# Altium PCB PCB1.PcbDoc
Units mm, origin at the board's own origin, x right, y up, seen from the top; angles counter-clockwise.
Board outline 134.1 x 120.7 mm, 2 copper layers (Top Layer, Bottom Layer); 24 components, 52 nets, 144 pads, 10 vias.
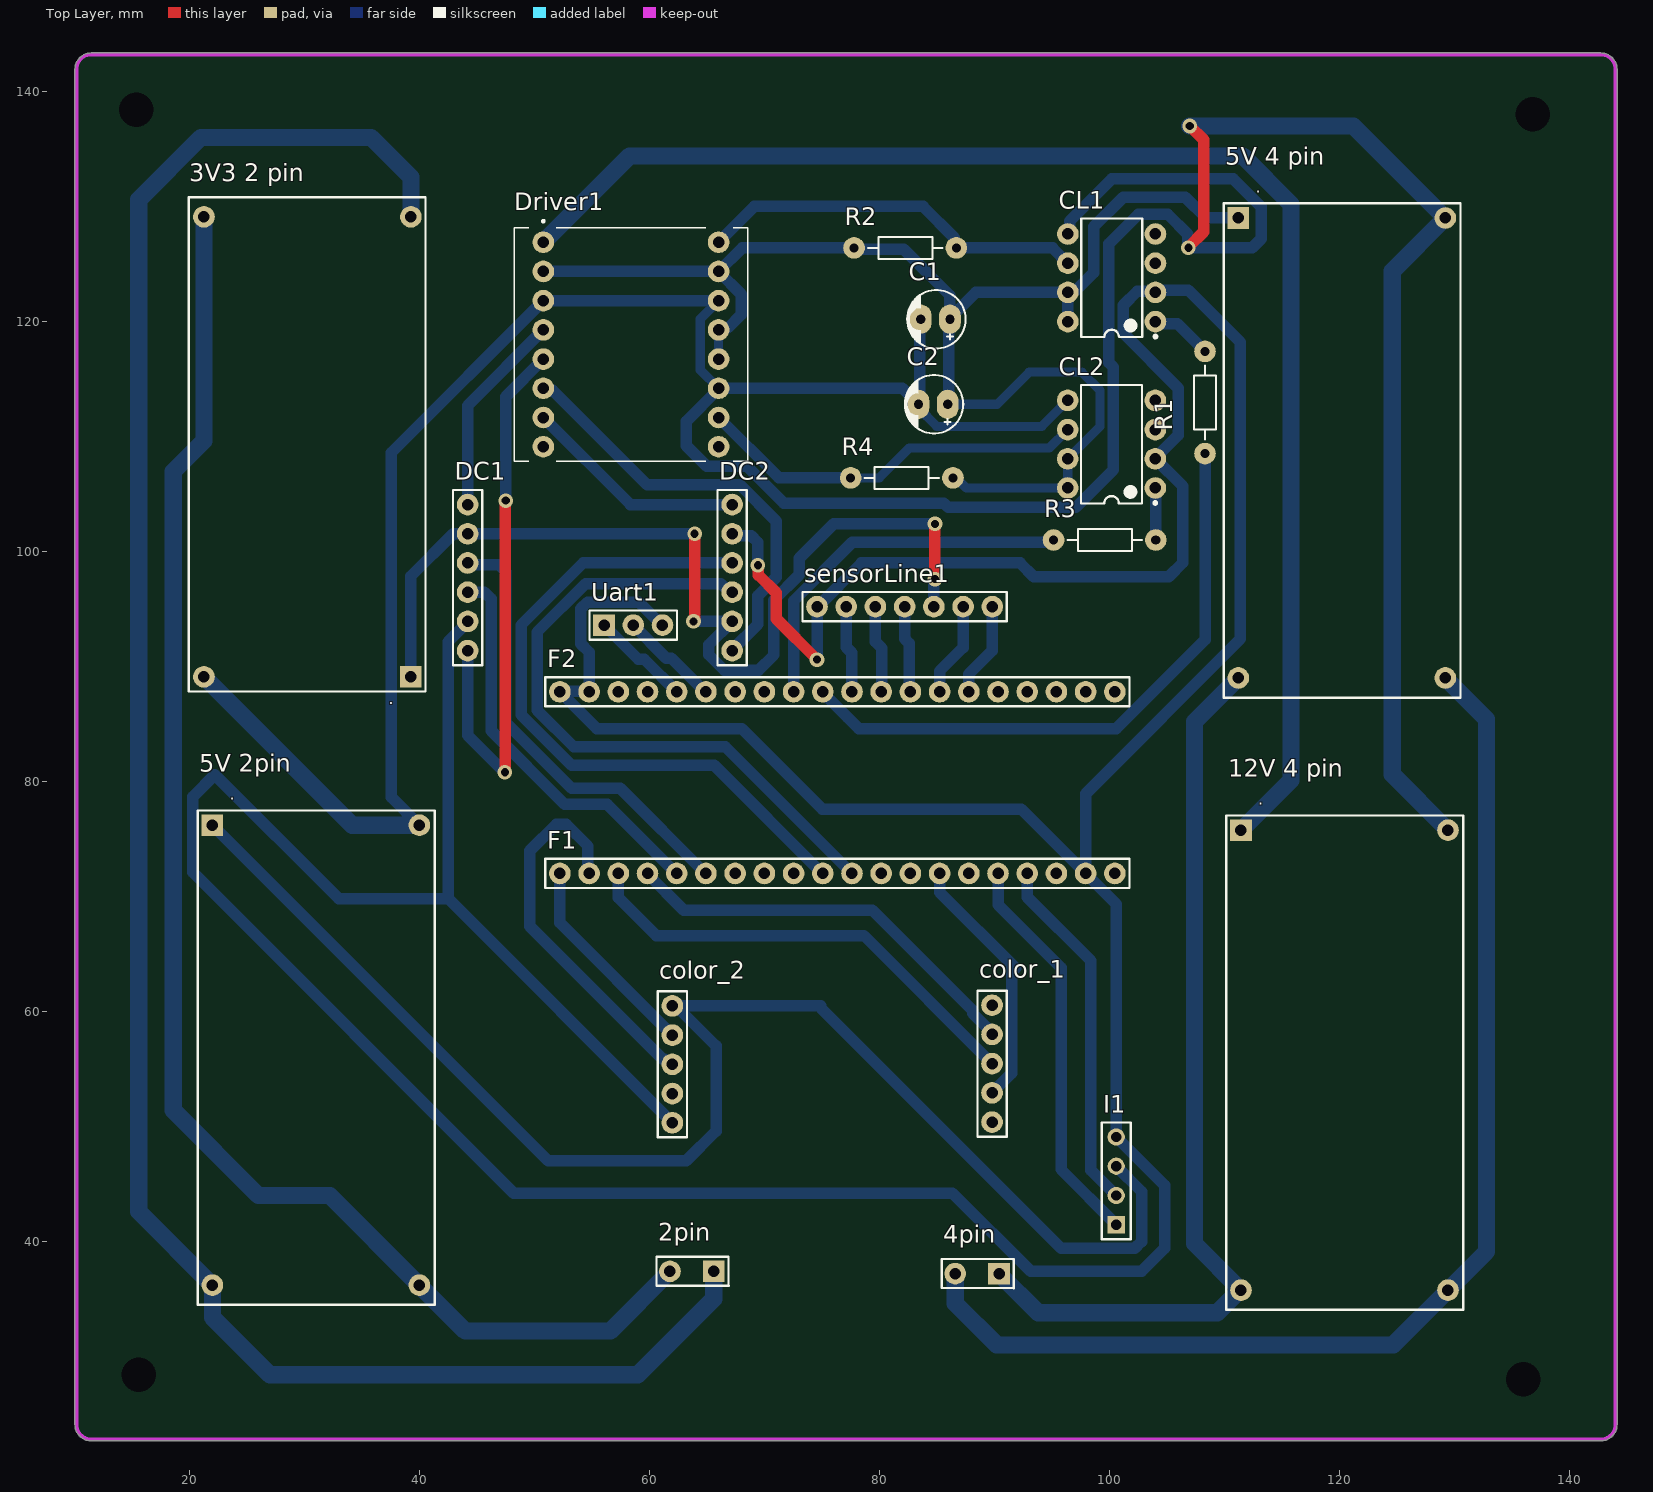
[diagram p0: Top Layer view]
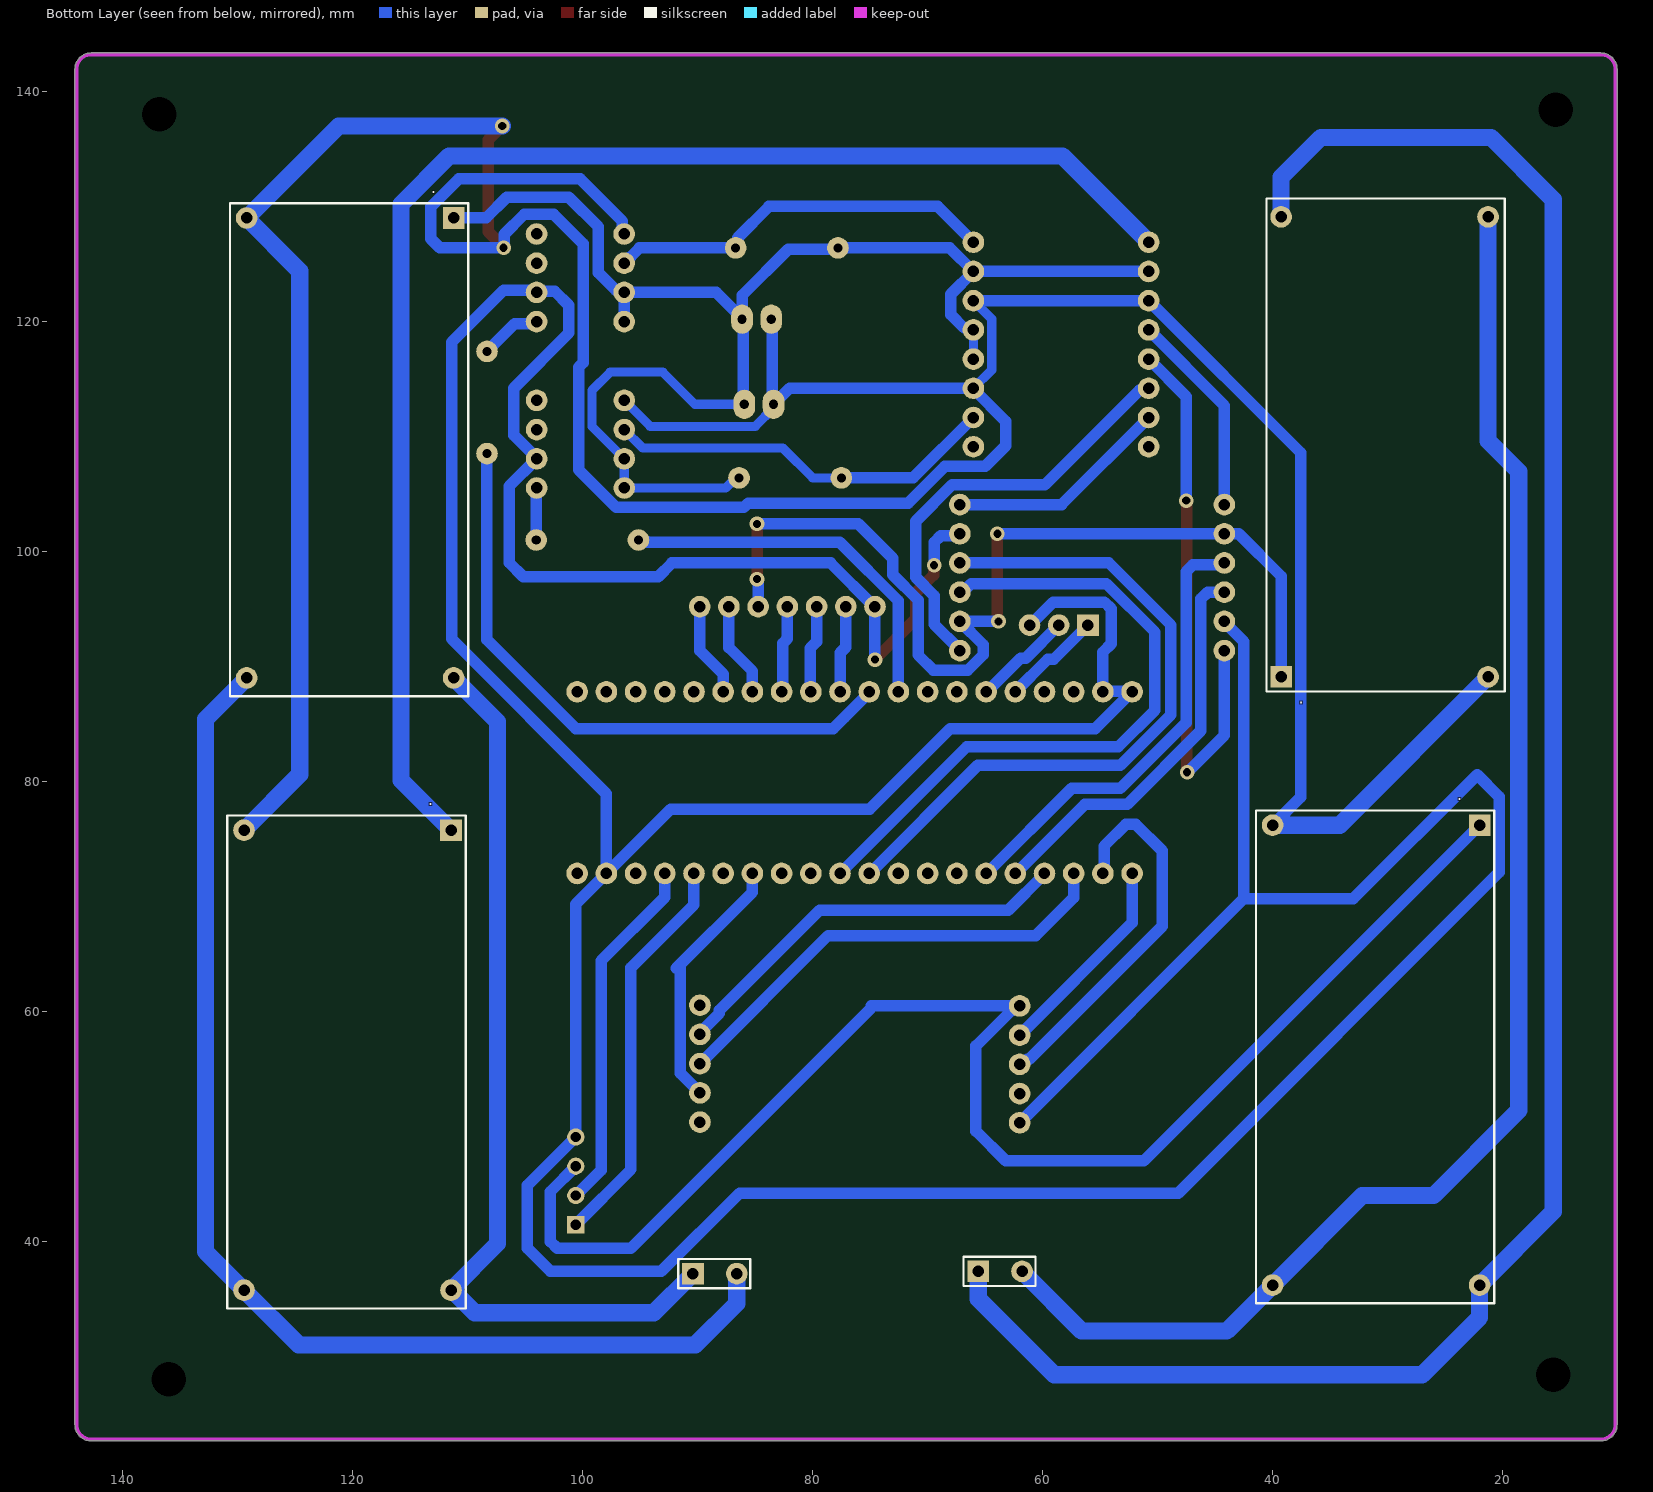
[diagram p1: Bottom Layer view, seen from below]

## Layer stack, top to bottom
Top Solder: solder mask 0.0102, Solder Resist, Dk 3.5
Top Layer: signal copper 0.0356
Dielectric 1: dielectric 0.32, FR-4, Dk 4.8
Bottom Layer: signal copper 0.0356
Bottom Solder: solder mask 0.0102, Solder Resist, Dk 3.5

## Board outline
10.011,24.07 10.011,141.93 cw(c11.432,141.93) 11.432,143.35 142.692,143.35 cw(c142.692,141.93) 144.112,141.93 144.112,24.07 cw(c142.692,24.07) 142.692,22.65 11.432,22.65 cw(c11.432,24.07)

## Design rules (kind name [scope] priority, off if disabled: settings)
Clearance [All] p1: gap=0.254 ignorepadtopadclearanceinfootprint=FALSE except(0: Arc-Hole Track-Hole SMDPad-Hole THPad-Hole Via-Hole Fill-Hole Poly-Hole Region-Hole Text-Hole)
PolygonConnect [All] p1: connectstyle=Direct reliefconductorwidth=0.254 reliefentries=4 polygonreliefangle="90 Angle" airgapwidth=0.254
RoutingVias [All] p1: holewidth=0.711 width=1.27 viastyle="Through Hole" minholewidth=0.711 minwidth=1.27 maxholewidth=0.711 maxwidth=1.27
SolderMaskExpansion [All] p1: expansion=0.102 istentingtop=FALSE
Width [All] p1: maxlimit=1.5 minlimit=0.8 preferedwidth=1
30 further rules are at their usual default settings.

## Classes and differential pairs
component class schematic_total: 2pin "3V3 2 pin" 4pin "5V 2pin" "12V 4 pin" C1 C2 CL1 CL2 color_1 color_2 DC1 DC2 F1 F2 I1 R1 R2 R3 R4 sensorLine1 Uart1

## Components (designator, comment, footprint, x,y, rotation, side; value= is the part's Value field where it differs from the comment)
2pin "IO" CON.HDR1X2 65.562,37.4 r180 top
"3V3 2 pin" "IO" CON.HDR1X4 39.227,89.099 r90 top
4pin "IO" CON.HDR1X2 90.372,37.2 r180 top
"5V 2pin" "IO" CON.HDR1X4 21.962,76.2 r270 top
"5V 4 pin" "IO" CON.HDR1X4 111.18,129 r270 top
"12V 4 pin" "IO" CON.HDR1X4 111.412,75.764 r270 top
C1 "0.1uF" CP1/2 86.102,120.2 r180 top value=10uF/50V
C2 "0.1uF" CP1/2 85.902,112.8 r180 top value=10uF/50V
CL1 "6N137" DIP-8 100.162,123.8 r180 top
CL2 "6N137" DIP-8 100.152,109.33 r180 top
color_1 "color_1" HDR1X5 89.762,50.38 r90 top
color_2 "color_2" HDR1X5 61.962,60.48 r270 top
DC1 "DC1" HDR1X6 44.162,91.38 r90 top
DC2 "DC2" HDR1X6 67.162,104.08 r270 top
Driver1 "ROB-14450" MODULE_ROB-14450 58.362,118 r0 top
F1 "F1_1" HDR1X20 52.182,72 r0 top
F2 "F1_2" HDR1X20 100.442,87.8 r180 top
I1 "I2C_LCD" HDR1X4 100.562,41.46 r90 top
R1 "220R" R1/4W 108.284,108.51 r90 top value="R1/4W - 1K"
R2 "220R" R1/4W 77.762,126.4 r0 top value="R1/4W - 1K"
R3 "220R" R1/4W 95.11,101 r0 top value="R1/4W - 1K"
R4 "220R" R1/4W 86.362,106.4 r180 top value="R1/4W - 1K"
sensorLine1 "sensorLine" HDR1X7 89.782,95.2 r180 top
Uart1 "Uart" HDR1X3 56.022,93.6 r0 top

## Footprints (in the part's own frame and the unit in brackets; to place one, negate y for a bottom-side part, rotate by r counter-clockwise, add the part's x,y. Pads: shape width x height; smd on the part's side, far side on the other; paste and mask are expansions set on the pad)
CON.HDR1X2 [mm]
  rect 1.88x1.88 hole 1: 1(0,0)
  round 1.88 hole 1: 2(3.81,0)
  silkscreen extent -1.31,-1.26 4.98,1.28
CON.HDR1X4 [mm]
  rect 1.88x1.88 hole 1: 1(0,0)
  round 1.88 hole 1: 2(0,18) 3(40,0) 4(40,18)
  silkscreen extent -1.27,-1.27 41.71,19.33, body extent -1.43,-1.32 41.64,19.44, height 8.89
CP1/2 [mm]
  oval 1.88x2.54 hole 0.813: 1(0,0) 2(2.54,0)
  silkscreen extent -1.36,-2.54 3.72,2.54, body extent -1.26,-2.53 3.8,2.53, height 7.29
DIP-8 [mm]
  round 1.88 hole 1: 1(-3.81,3.81) 2(-3.81,1.27) 3(-3.81,-1.27) 4(-3.81,-3.81) 5(3.81,-3.81) 6(3.81,-1.27) 7(3.81,1.27) 8(3.81,3.81)
  silkscreen extent -3.94,-5.15 2.65,5.23, body extent -3.6,-5.15 3.6,5.15, height 5.08
HDR1X3 [mm]
  rect 1.88x1.88 hole 1: 1(0,0)
  round 1.88 hole 1: 2(2.54,0) 3(5.08,0)
  silkscreen extent -1.27,-1.27 6.35,1.27
HDR1X4 [mm]
  rect 1.5x1.5 hole 0.9: 1(0,0)
  round 1.5 hole 0.9: 2(2.54,0) 3(5.08,0) 4(7.62,0)
  silkscreen extent -1.27,-1.27 8.89,1.27
HDR1X5 [mm]
  round 1.88 hole 1: 1(0,0) 2(2.54,0) 3(5.08,0) 4(7.62,0) 5(10.16,0)
  silkscreen extent -1.27,-1.27 11.43,1.27
HDR1X6 [mm]
  round 1.88 hole 1: 1(0,0) 2(2.54,0) 3(5.08,0) 4(7.62,0) 5(10.16,0) 6(12.7,0)
  silkscreen extent -1.27,-1.27 13.97,1.27
HDR1X7 [mm]
  round 1.88 hole 1: 1(0,0) 2(2.54,0) 3(5.08,0) 4(7.62,0) 5(10.16,0) 6(12.7,0) 7(15.24,0)
  silkscreen extent -1.27,-1.27 16.51,1.27
HDR1X20 [mm]
  round 1.88 hole 1: 1(0,0) 2(2.54,0) 3(5.08,0) 4(7.62,0) 5(10.16,0) 6(12.7,0) 7(15.24,0) 8(17.78,0) 9(20.32,0) 10(22.86,0) 11(25.4,0) 12(27.94,0) 13(30.48,0) 14(33.02,0) 15(35.56,0) 16(38.1,0) 17(40.64,0) 18(43.18,0) 19(45.72,0) 20(48.26,0)
  silkscreen extent -1.27,-1.27 49.53,1.27
MODULE_ROB-14450 [mm]
  round 1.88 hole 1: 1(-7.62,8.89) 2(-7.62,6.35) 3(-7.62,3.81) 4(-7.62,1.27) 5(-7.62,-1.27) 6(-7.62,-3.81) 7(-7.62,-6.35) 8(-7.62,-8.89) 9(7.62,-8.89) 10(7.62,-6.35) 11(7.62,-3.81) 12(7.62,-1.27) 13(7.62,1.27) 14(7.62,3.81) 15(7.62,6.35) 16(7.62,8.89)
  silkscreen extent -10.16,-10.16 10.16,10.83, body extent -10.16,-10.16 10.16,10.16, height 5.5
R1/4W [mm]
  round 1.88 hole 0.787: 1(0,0) 2(8.89,0)
  silkscreen extent 1.22,-0.97 7.67,0.97, body extent -1.01,-1.19 9.79,1.21, height 2.83

## Part data
2pin 4pin: library part CON.HDR1x2, "Header 1x2", ComponentLink1Description="Digikey Part link", ComponentLink2Description="Open DataSheet", ComponentLink2URL=H:\LIBRARY\LIBRARY.Datasheet\, Publisher="Hoang Nguyen"
"3V3 2 pin" "5V 2pin" "5V 4 pin" "12V 4 pin": library part CON.HDR1x4, "Header 1x4", ComponentLink1Description="Digikey Part link", ComponentLink2Description="Open DataSheet", ComponentLink2URL=H:\LIBRARY\LIBRARY.Datasheet\, Publisher="Hoang Nguyen"
C1 C2: library part CP1, "Cap P  0,1uF < 22uF , 16 - 50V", Description 1="10 => 220uF/6,3V/10V - 10uF => 100uF/16V", Description 2="0,1uF => 33uF/50V - 10uF => 22uF/63V", Description 3="0,47uF => 10uF/100V"
CL1 CL2: "Single-Channel, High Speed 10MBit/s Logic Gate Optocouplers"
color_1: library part "Header 5", "Header, 5-Pin", LatestRevisionDate=17-Jul-2002, LatestRevisionNote="Re-released for DXP Platform.", Publisher="Altium Limited"
color_2: library part "Header 5_1", "Header, 5-Pin", LatestRevisionDate=17-Jul-2002, LatestRevisionNote="Re-released for DXP Platform.", Publisher="Altium Limited"
DC1: library part "Header 6", "Header, 6-Pin", LatestRevisionDate=17-Jul-2002, LatestRevisionNote="Re-released for DXP Platform.", Publisher="Altium Limited"
DC2: library part "Header 6_1", "Header, 6-Pin", LatestRevisionDate=17-Jul-2002, LatestRevisionNote="Re-released for DXP Platform.", Publisher="Altium Limited"
Driver1: "TB6612FNG Motor Controller/Driver Power Management Evaluation Board", Package=None, Availability="In Stock", Check_prices=https://www.snapeda.com/parts/ROB-14450/SparkFun%20Electronics/view-part/2656367/?ref=eda, MF="SparkFun Electronics", MP=ROB-14450, Price=None, SnapEDA_Link=https://www.snapeda.com/parts/ROB-14450/SparkFun%20Electronics/view-part/2656367/?ref=snap
F1: library part "Header 20", "Header, 20-Pin", LatestRevisionDate=17-Jul-2002, LatestRevisionNote="Re-released for DXP Platform.", Publisher="Altium Limited"
F2: library part "Header 20_1", "Header, 20-Pin", LatestRevisionDate=17-Jul-2002, LatestRevisionNote="Re-released for DXP Platform.", Publisher="Altium Limited"
I1: library part "Header 4", "Header, 4-Pin", LatestRevisionDate=17-Jul-2002, LatestRevisionNote="Re-released for DXP Platform.", Publisher="Altium Limited"
R1 R2 R3 R4: library part R, "Resistor 1/4W"
sensorLine1: library part "Header 7", "Header, 7-Pin", LatestRevisionDate=17-Jul-2002, LatestRevisionNote="Re-released for DXP Platform.", Publisher="Altium Limited"
Uart1: library part "Header 3", "Header, 3-Pin", LatestRevisionDate=17-Jul-2002, LatestRevisionNote="Re-released for DXP Platform.", Publisher="Altium Limited"

## Free pads (board coordinates)
  round 1.3 hole 3 mask+0.1: 3(15.362,138.4) 4(136.762,138) 5(135.962,28) 6(15.562,28.4)

## Via types
v1: diameter 1.27, hole 0.711, Top Layer to Bottom Layer, 10 vias

## Nets (pads, with @x,y where several pads share a name; then routed paths per layer and width w, separated by ;. In a path a pad name is that pad's centre, name@x,y a point inside that pad or via, vN(x,y) a via of type N, cw(c..) or ccw(c..) an arc to the next point about the centre after c; other vN are vias at no path point)
3V3_2pin: "3V3 2 pin.1" DC1.5 DC2.5 sensorLine1.3 | length 86.5
  Top Layer w1: v1(63.8,93.92) 63.8,93.993 63.896,94.089 v1(63.896,101.54) ; DC2.5@67.028,93.786 DC2.5 ; sensorLine1.3@84.562,95.06 sensorLine1.3 ; v1(84.8,97.6) v1(84.8,102.4)
  Bottom Layer w1: 39.227,89.099 39.227,97.866 42.902,101.54 DC1.5 v1(63.896,101.54) ; v1(63.8,93.92) DC2.5 65.108,91.866 65.108,91.038 66.46,89.686 69.486,89.686 70.8,91 70.8,95.773 73,97.973 73,99.4 76,102.4 v1(84.8,102.4) ; sensorLine1.3 84.702,97.429 84.8,97.527 v1(84.8,97.6)
"5V 2pin": F1.18
5V_2pin: "5V 2pin.1" color_2.1 I1.3 | length 125.8
  Bottom Layer w1: 21.962,76.2 51.162,47 62.898,47 ; color_2.1 62.2,60.48 62.64,60.04 62.722,60.04 65.762,57 65.762,49.6 63.17,47.008 ; color_2.1@62.64,60.48 74.882,60.48 ; 74.888,60.274 95.762,39.4 102.176,39.4 102.762,39.986 102.762,44.34 I1.3
5V_4pin: "5V 4 pin.1" C1.1 C2.1 CL1.7 CL1.8 CL2.7 CL2.8 Driver1.2 Driver1.12 Driver1.13 Driver1.15 R2.1 R4.1 | length 126.4
  Bottom Layer w0.8: Driver1.12 Driver1.13 ; C2.1 90.204,112.8 93.004,115.6 97.562,115.6 99.162,114 99.162,110.88 CL2.7 CL2.8 87.534,105.52 86.654,106.4 R4.1
  Bottom Layer w1: Driver1.2 Driver1.15 ; Driver1.13 66.15,119.438 66.8,119.438 67.962,120.6 67.962,122.37 Driver1.15 ; C2.1 86.002,112.9 86.002,120.1 C1.1 86.102,122.26 82.076,126.286 77.876,126.286 R2.1 68.032,126.4 Driver1.15 ; C1.1@86.102,120.292 88.34,122.53 CL1.7 CL1.8 ; CL1.7@97.092,122.73 98.592,124.231 98.592,128.231 101.162,130.8 106.562,130.8 108.362,129 111.18,129
12V: "12V 4 pin.1" Driver1.1 | length 126.1
  Bottom Layer w1.5: Driver1.1 58.252,134.4 111.562,134.4 115.762,130.2 115.762,80.114 111.412,75.764
A01: DC1.1 Driver1.5 | length 49.3
  Top Layer w1: v1@47.398,104.422 v1(47.471,104.422) 47.436,104.387 47.436,80.841 v1(47.4,80.805)
  Bottom Layer w1: DC1.1 44.162,84 47.362,80.8 47.367,80.805 v1(47.4,80.805) ; v1(47.471,104.422) 47.471,113.46 Driver1.5
A02: DC1.6 Driver1.4 | length 18.2
  Bottom Layer w1: DC1.6@44.162,103.817 44.162,112.69 Driver1.4
B01: DC2.1 Driver1.7 | length 19.6
  Bottom Layer w1: Driver1.7 58.312,104.08 DC2.1
B02: DC2.6 Driver1.6 | length 37.9
  Bottom Layer w1: Driver1.6 50.91,114.022 51.54,114.022 59.762,105.8 67.837,105.8 71,102.637 71,97.747 69.4,96.147 69.4,93.681 67.162,91.443 DC2.6
GND: CL1.2 CL2.2 color_2.5 DC1.2 DC2.2 F1.19 F2.19 F2.20 I1.4 sensorLine1.7 Uart1.3 | length 437.3
  Top Layer w1: F2.20 F2.20@52.182,88.038 ; v1(69.4,98.8) 69.452,98.748 69.452,97.948 71,96.4 71,94.142 v1(74.542,90.6) ; sensorLine1.7@74.373,95.368 sensorLine1.7 sensorLine1.7@74.562,95.22 ; CL2.2@103.793,107.892 CL2.2
  Bottom Layer w1: DC1.2 44.162,93.857 42.468,92.163 42.468,69.814 ; F2.20@52.062,87.846 54.602,87.846 F2.19@54.602,88.084 ; F2.20 55.382,84.6 68,84.6 75,77.6 92.302,77.6 F1.19 ; F2.19 54.722,91.248 54,91.97 54,95.014 54.586,95.6 59.039,95.6 61.039,93.6 Uart1.3 ; color_2.5 42.468,69.814 ; DC2.2 67.33,101.372 68.814,101.372 69.4,100.786 v1@69.4,99 ; v1(74.542,90.6) sensorLine1.7 74.604,95.2 78.404,99 92.2,99 93.4,97.8 105.122,97.8 106.362,99.04 106.362,105.66 CL2.2 103.962,108.123 105.962,110.123 105.962,114.2 101.162,119 101.162,121.4 102.406,122.645 103.886,122.645 103.972,122.73 106.832,122.73 111.362,118.2 111.362,92.4 97.902,78.94 F1.19 ; 42.468,69.814 32.948,69.814 22.176,80.586 20.268,78.678 20.268,72.094 48.162,44.2 86.318,44.2 93.118,37.4 102.762,37.4 104.762,39.4 104.762,44.88 I1.4 100.562,69.34 F1.19
J+_2pin: 2pin.1 "3V3 2 pin.3" "5V 2pin.3" | length 181.4
  Bottom Layer w1.5: 39.227,129.099 39.227,132.534 35.762,136 20.962,136 15.562,130.6 15.562,42.6 21.962,36.2 21.962,33.4 26.962,28.4 58.962,28.4 65.562,35 2pin.1
J+_4pin: 4pin.1 "5V 4 pin.3" "12V 4 pin.3" | length 79.8
  Bottom Layer w1.5: 4pin.1 93.772,33.8 109.345,33.8 111.309,35.764 111.412,35.764 107.362,39.814 107.362,85.182 111.18,89
J-_2pin: 2pin.2 "3V3 2 pin.4" "5V 2pin.4" | length 132.1
  Bottom Layer w1.5: 21.227,129.099 21.227,109.617 18.562,106.951 18.562,51.4 25.962,44 32.162,44 39.962,36.2 43.962,32.2 56.552,32.2 2pin.2
J-_4pin: 4pin.2 "5V 4 pin.4" "12V 4 pin.4" | length 105
  Bottom Layer w1.5: 4pin.2 86.562,34.6 90.162,31 124.648,31 129.412,35.764 132.762,39.114 132.762,85.418 129.18,89
NetCL1_1: CL1.1 R1.2 | length 5.4
  Bottom Layer w1: CL1.1 104.14,119.822 105.862,119.822 R1.2
NetCL2_1: CL2.1 R3.2 | length 4.5
  Bottom Layer w1: CL2.1 103.981,105.501 103.981,101.019 R3.2
NRST: F2.17
PA0: F2.5
PA1: F2.6 sensorLine1.1 | length 8.2
  Bottom Layer w1: F2.6 87.742,89.342 89.782,91.382 sensorLine1.1
PA2: F2.7 sensorLine1.2 | length 8.2
  Bottom Layer w1: F2.7 85.202,89.602 87.242,91.642 sensorLine1.2
PA3: F2.8 sensorLine1.4 | length 7.6
  Bottom Layer w1: sensorLine1.4 82.162,92.4 82.548,92.014 82.548,87.914 F2.8
PA4: F2.9 sensorLine1.5 | length 7.6
  Bottom Layer w1: sensorLine1.5 79.622,92.14 80.162,91.6 80.162,87.84 F2.9
PA5: F2.10 sensorLine1.6 | length 7.6
  Bottom Layer w1: sensorLine1.6 77.082,91.68 77.562,91.2 77.562,87.82 F2.10
PA6: F2.11 R1.1 | length 54.1
  Bottom Layer w1: F2.11@74.922,87.846 77.168,85.6 78.168,84.6 100.562,84.6 108.284,92.322 R1.1
PA7: F2.12 R3.1 | length 32.7
  Bottom Layer w1: F2.12 72.502,95.702 77.6,100.8 94.288,100.8 94.319,100.832 94.942,100.832 R3.1
PA8: DC1.3 F1.5 | length 35
  Bottom Layer w1: DC1.3 44.164,96.462 45.614,96.462 46.2,95.876 46.2,84.4 52.6,78 56.302,78 62.302,72 F1.5
PA9: DC1.4 F1.6 | length 39.6
  Bottom Layer w1: DC1.4 44.33,98.832 46.906,98.832 47.492,98.246 47.492,85.108 53.2,79.4 57.442,79.4 64.842,72 F1.6
PA10: F1.7
PA11: F1.8
PA12: F1.9
PA15: DC2.3 F1.10 | length 60.4
  Bottom Layer w1: DC2.3 54.2,99 48.8,93.6 48.8,85.8 53.2,81.4 65.602,81.4 75.002,72 F1.10
PB0: F2.13
PB1: F2.14
PB3: DC2.4 F1.11 | length 59.1
  Bottom Layer w1: DC2.4 66.924,96.46 66.184,97.2 54.412,97.2 50.2,92.988 50.2,86.2 53.4,83 66.582,83 F1.11
PB4: F1.12
PB5: F1.13
PB6: color_1.2 F1.14 | length 22.7
  Bottom Layer w1: F1.14 85.202,70.36 91.815,63.747 ; color_1.2 91.479,54.637 91.479,63.883
PB7: F1.15
PB8: F1.16 I1.1 | length 34.8
  Bottom Layer w1: F1.16 90.282,69.28 95.762,63.8 95.762,46.26 I1.1
PB9: F1.17 I1.2 | length 31.2
  Bottom Layer w1: F1.17 92.822,69.94 98.362,64.4 98.362,46.2 I1.2
PB10: F2.15 Uart1.2 | length 8.7
  Bottom Layer w1: Uart1.2 61.439,90.723 61.885,90.723 64.808,87.8 F2.15
PB11: F2.16 Uart1.1 | length 8.7
  Bottom Layer w1: Uart1.1 59.011,90.611 59.531,90.611 F2.16
PB12: color_2.2 F1.1 | length 18.1
  Bottom Layer w1: F1.1 52.182,67.72 color_2.2
PB13: color_2.3 F1.2 | length 33.2
  Bottom Layer w1: F1.2 54.616,72.105 54.616,74.384 52.714,76.286 51.886,76.286 49.562,73.962 49.562,67.4 61.122,55.84 61.284,55.84 61.724,55.4 color_2.3
PB14: color_1.3 F1.3 | length 40.6
  Bottom Layer w1: F1.3 57.262,69.9 60.562,66.6 78.622,66.6 color_1.3
PB15: color_1.4 F1.4 | length 36
  Bottom Layer w1: F1.4 59.802,71.96 62.962,68.8 79.362,68.8 88.068,60.094 88.068,59.838 89.762,58.144 color_1.4
PC13: F2.2
PC14: F2.3
PC15: F2.4
PGND: "3V3 2 pin.2" "5V 2pin.2" "5V 4 pin.2" "12V 4 pin.2" C1.2 C2.2 CL1.5 CL2.5 Driver1.3 Driver1.11 Driver1.14 | length 340.9
  Top Layer w1: CL1.5@96.386,127.5 CL1.5@96.462,127.5 ; v1(106.837,126.411) 106.837,126.484 108.162,127.809 108.162,135.8 v1(106.962,137) ; 129.117,129 129.18,129
  Bottom Layer w0.8: Driver1.11 64.388,115.784 64.388,120.216 Driver1.14 ; C2.2 83.362,112.47 84.956,110.876 94.078,110.876 CL2.5
  Bottom Layer w1: 39.962,76.2 37.533,78.628 37.533,108.602 Driver1.3 Driver1.14 ; C2.2@82.955,113.298 82.863,113.298 81.972,114.19 Driver1.11 65.982,114.127 63.162,111.307 63.162,109.2 64.962,107.4 68.458,107.4 71.669,104.189 85.575,104.189 85.938,103.826 97.043,103.826 100.316,107.098 100.316,116.018 99.908,116.426 99.908,126.746 102.466,129.304 105.058,129.304 106.785,127.577 106.785,126.463 v1(106.837,126.411) 112.387,126.411 113.162,127.186 113.162,129.964 110.726,132.4 100.184,132.4 96.52,128.736 96.52,127.778 CL1.5 ; C2.2 83.462,112.9 83.462,120.1 C1.2
  Bottom Layer w1.5: 21.227,89.099 34.126,76.2 39.962,76.2 ; v1(106.962,137) 121.18,137 129.18,129 124.562,124.382 124.562,80.614 129.412,75.764
PW1: CL1.6 Driver1.16 R2.2 | length 34.1
  Bottom Layer w1: Driver1.16 69.092,130 83.762,130 86.483,127.278 86.483,126.568 R2.2 95.022,126.4 CL1.6
PW2: CL2.6 Driver1.10 R4.2 | length 34.3
  Bottom Layer w0.8: R4.2 79.962,106.4 82.562,109 94.742,109 CL2.6
  Bottom Layer w1: Driver1.10 71.232,106.4 R4.2
pads on no net: CL1.3 CL1.4 CL2.3 CL2.4 color_1.1 color_1.5 color_2.4 Driver1.8 Driver1.9 F1.20 F2.1 F2.18

## Keep-outs
Keep-Out Layer:
  lines w0.3: 118.362,22.8 142.692,22.8 ccw(c142.692,24.07) 143.962,24.07 143.962,141.93 ccw(c142.692,141.93) 142.692,143.2 11.432,143.2 ccw(c11.432,141.93) 10.162,141.93 10.162,24.07 ccw(c11.432,24.07) 11.432,22.8 118.962,22.8

## Dimensions
61.962,50.32 to 11.432,22.8 on Top Overlay
15.562,28.4 to 15.362,138.4 on Top Overlay
135.962,28 to 15.562,28.4 on Top Overlay
136.762,138 to 135.962,28 on Top Overlay
15.362,138.4 to 136.762,138 on Top Overlay
61.962,50.32 to 65.562,37.4 on Top Overlay
61.962,60.48 to 89.762,60.54 on Top Overlay
54.722,87.8 to 54.722,72 on Top Overlay